# EAGLE board oldClock2 (EAGLE 6.5.0)
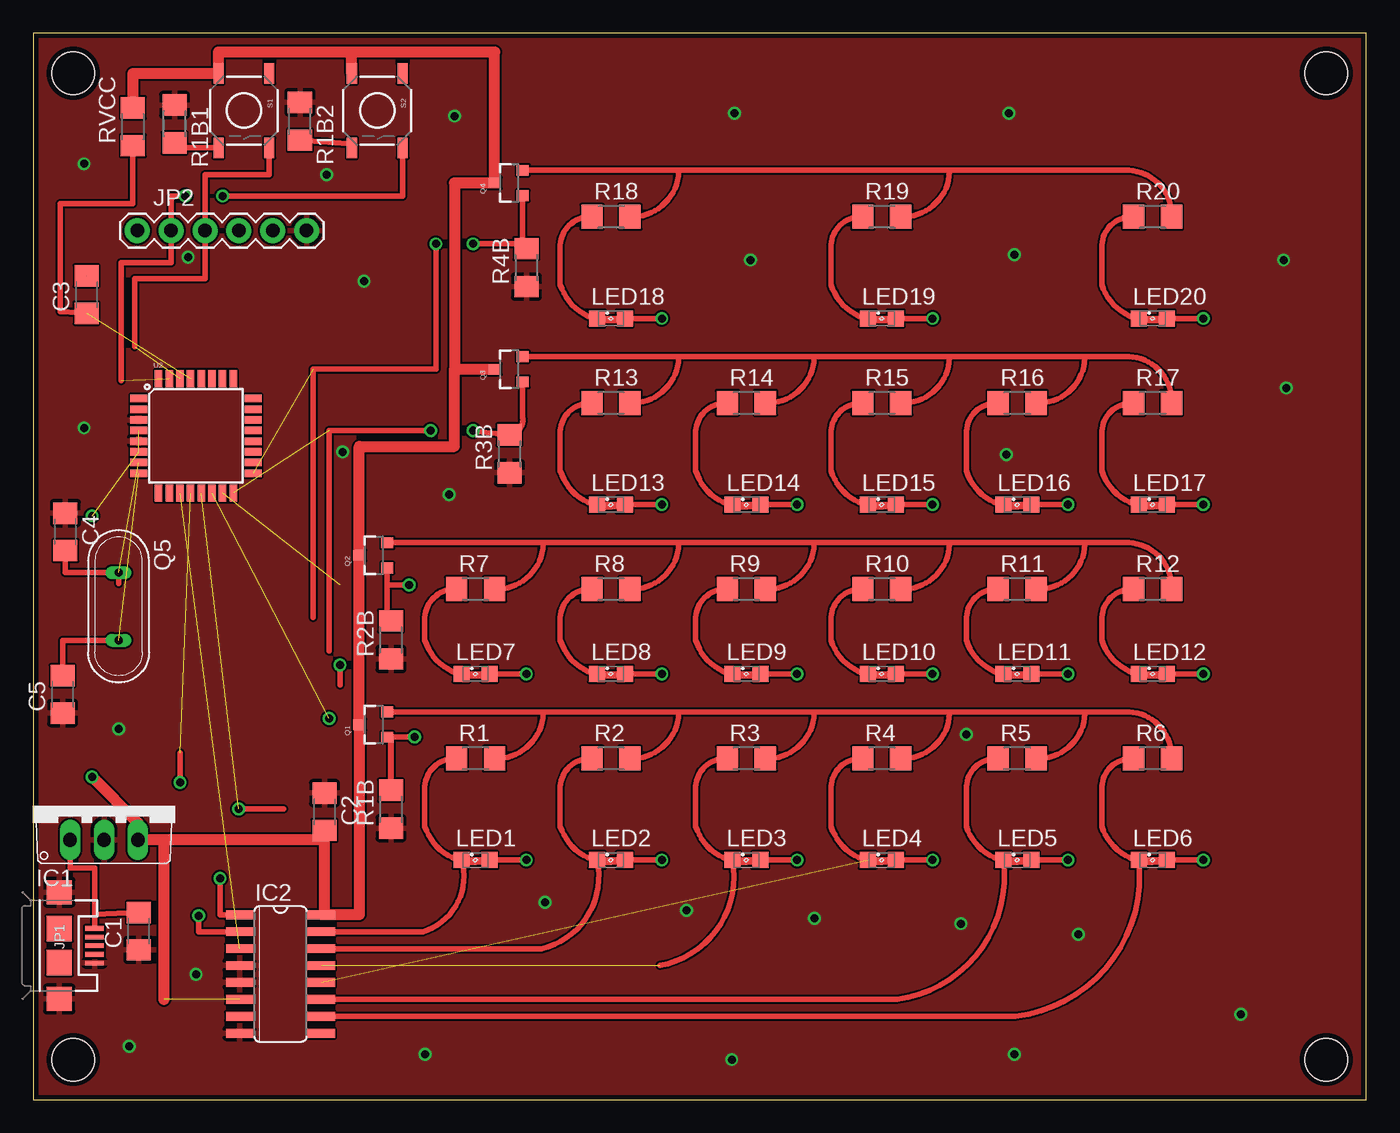
[diagram p0: board, top side]
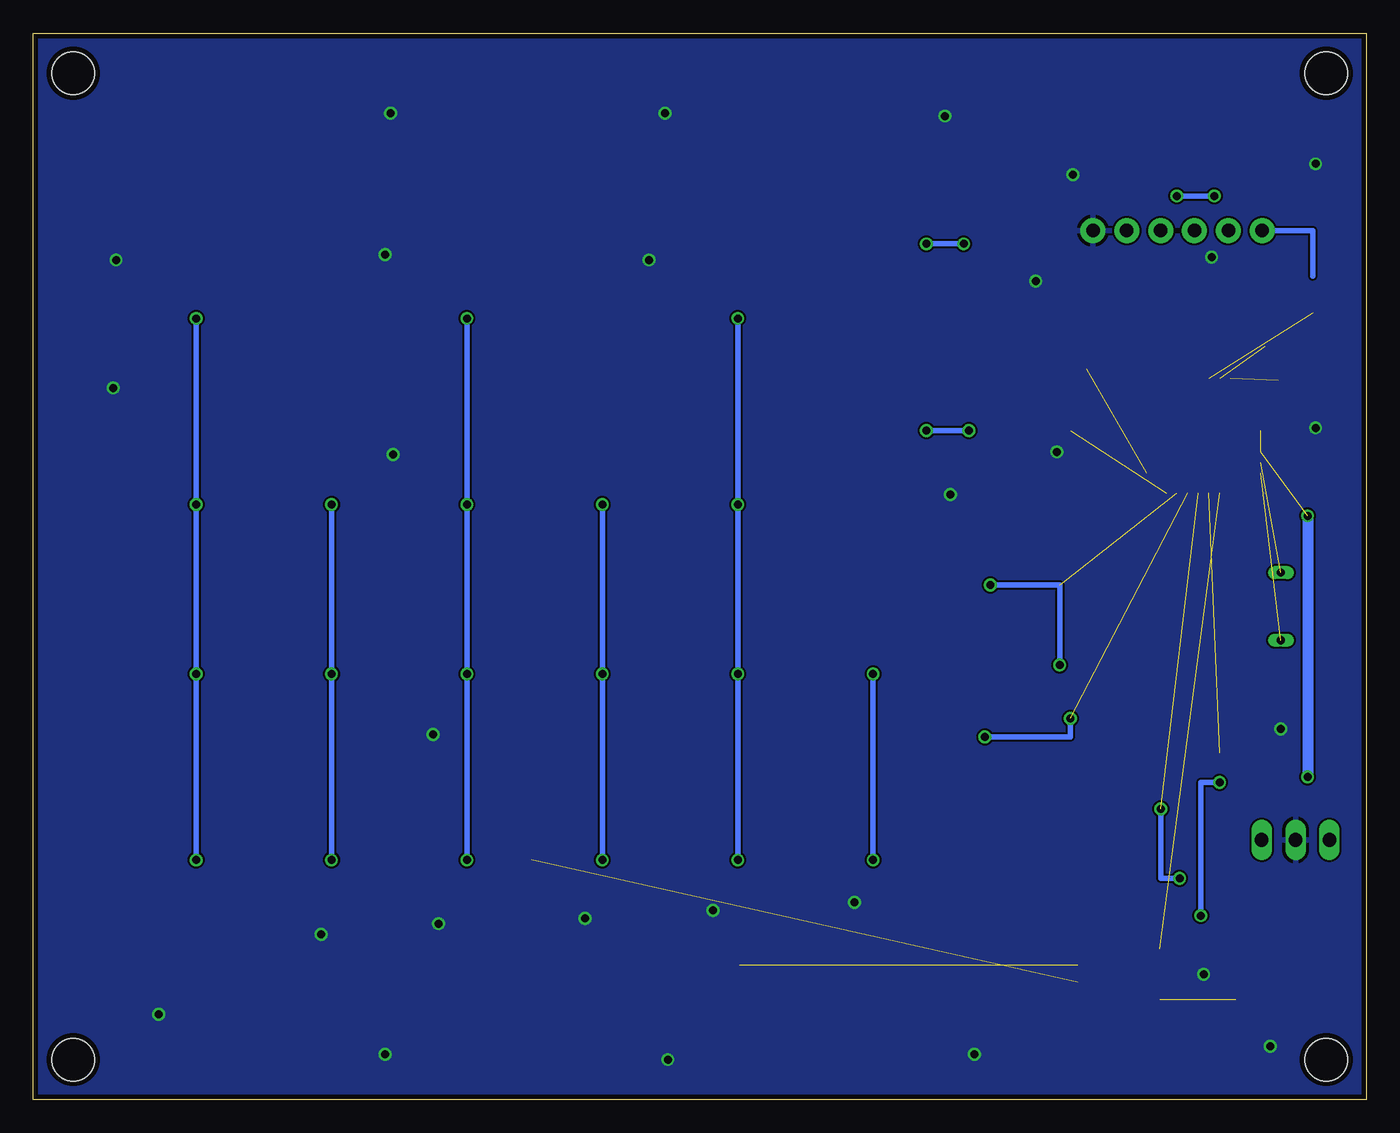
[diagram p1: board, bottom side, seen from below]

Size 100 x 80 mm. Coordinates in mm from the lower left corner, seen from the top.
Outline: 0,0 100,0 100,80 0,80 0,0
Copper layers (1*16): Top 0.0356mm / dielectric 1.5011mm / Bottom 0.0356mm
Design rules "LaenPCBOrder": minimum track width 6mil, minimum drill 13mil, track to track 6mil, track to pad 6mil, pad to pad 6mil, via to via 6mil, smd to smd 6mil, copper to edge 15mil, drill to drill 6mil, minimum pad ring 7mil, minimum via ring 7mil, stop-mask expansion 3mil, vias tented up to drill 0mil, thermal gap 10mil
Holes 3.2 mm at 97,77 97,3 3,77 3,3

## Footprints (pad centres in the part's own frame; a part is rotated, then mirrored left to right if it is on the bottom)
C1206 = smd 1.6 x 1.8: 1 -1.4,0; 2 1.4,0
TO220V = drill 1.016 long: 1 -2.54,-2.54; 2 0,-2.54; 3 2.54,-2.54
SO16 = smd 0.66 x 2.032: 1 -4.445,-3.073; 2 -3.175,-3.073; 3 -1.905,-3.073; 4 -0.635,-3.073; 5 0.635,-3.073; 6 1.905,-3.073; 7 3.175,-3.073; 8 4.445,-3.073; 9 4.445,3.073; 10 3.175,3.073; 11 1.905,3.073; 12 0.635,3.073; 13 -0.635,3.073; 14 -1.905,3.073; 15 -3.175,3.073; 16 -4.445,3.073
USB-MICROB = smd 0.35 x 1.4: D+ 0,2.65; D- -0.65,2.65; GND 1.3,2.65; ID 0.65,2.65; VBUS -1.3,2.65 | smd 1.8 x 1.9: MT1 -4,0; MT2 4,0 | smd 1.9 x 1.9: P$1 -1.27,0; P$2 1.27,0
FTDI_BASIC = drill 1.016 pad 1.88: CTS 10.16,0; DTR 0,0; GND 12.7,0; RXI 2.54,0; TXO 5.08,0; VCC 7.62,0
SML0805 = smd 1.2 x 1.2: A 1.05,0; C -1.05,0
SOT23-3 = smd 0.8 x 0.9: 1 -0.95,-1; 2 0.95,-1; 3 0,1.1
QS = drill 0.61 long: 1 -2.54,0; 2 2.54,0
R1206 = smd 1.6 x 1.803: 1 -1.422,0; 2 1.422,0
TACTILE-SWITCH-SMD = smd 1.524 x 0.762: 1 -2.794,1.905; 2 2.794,1.905; 3 -2.794,-1.905; 4 2.794,-1.905
TQFP32-08 = smd 1.27 x 0.559: 1 -4.293,2.8; 2 -4.293,2; 3 -4.293,1.2; 4 -4.293,0.4; 5 -4.293,-0.4; 6 -4.293,-1.2; 7 -4.293,-2; 8 -4.293,-2.8; 17 4.293,-2.8; 18 4.293,-2; 19 4.293,-1.2; 20 4.293,-0.4; 21 4.293,0.4; 22 4.293,1.2; 23 4.293,2; 24 4.293,2.8 | smd 0.559 x 1.27: 9 -2.8,-4.293; 10 -2,-4.293; 11 -1.2,-4.293; 12 -0.4,-4.293; 13 0.4,-4.293; 14 1.2,-4.293; 15 2,-4.293; 16 2.8,-4.293; 25 2.8,4.293; 26 2,4.293; 27 1.2,4.293; 28 0.4,4.293; 29 -0.4,4.293; 30 -1.2,4.293; 31 -2,4.293; 32 -2.8,4.293

## Placement (x,y rotation side)
C1  33u  [C1206]  7.92,12.63 90 top
C2  10u  [C1206]  21.85,21.59 270 top
C3  10u  [C1206]  4,60.4 90 top
C4  18p  [C1206]  2.4,42.6 270 top
C5  18p  [C1206]  2.2,30.4 90 top
IC1  7805TV  [TO220V]  5.3,22.02 0 top
IC2  74AC138D  [SO16]  18.54,9.42 270 top
JP1  USB-MICROB  [USB-MICROB]  1.94,11.55 270 top
JP2  FTDI_BASICPTH  [FTDI_BASIC]  7.8,65.2 0 top
LED1  [SML0805]  33.18,17.97 0 top
LED2  [SML0805]  43.34,17.97 0 top
LED3  [SML0805]  53.5,17.97 0 top
LED4  [SML0805]  63.66,17.97 0 top
LED5  [SML0805]  73.82,17.97 0 top
LED6  [SML0805]  83.98,17.97 0 top
LED7  [SML0805]  33.18,31.94 0 top
LED8  [SML0805]  43.34,31.94 0 top
LED9  [SML0805]  53.5,31.94 0 top
LED10  [SML0805]  63.66,31.94 0 top
LED11  [SML0805]  73.82,31.94 0 top
LED12  [SML0805]  83.98,31.94 0 top
LED13  [SML0805]  43.34,44.64 0 top
LED14  [SML0805]  53.5,44.64 0 top
LED15  [SML0805]  63.66,44.64 0 top
LED16  [SML0805]  73.82,44.64 0 top
LED17  [SML0805]  83.98,44.64 0 top
LED18  [SML0805]  43.34,58.61 0 top
LED19  [SML0805]  63.66,58.61 0 top
LED20  [SML0805]  83.98,58.61 0 top
Q1  MOSFET-NCHANNELBSS138  [SOT23-3]  25.56,28.13 90 top
Q2  MOSFET-NCHANNELBSS138  [SOT23-3]  25.56,40.83 90 top
Q3  MOSFET-NCHANNELBSS138  [SOT23-3]  35.72,54.8 90 top
Q4  MOSFET-NCHANNELBSS138  [SOT23-3]  35.72,68.77 90 top
Q5  16M  [QS]  6.4,37 270 top
R1  150  [R1206]  33.18,25.59 0 top
R1B  4.7k  [R1206]  26.83,21.78 90 top
R1B1  4.7k  [R1206]  10.6,73.2 270 top
R1B2  4.7k  [R1206]  20,73.4 270 top
R2  150  [R1206]  43.34,25.59 0 top
R2B  4.7k  [R1206]  26.83,34.48 90 top
R3  150  [R1206]  53.5,25.59 0 top
R3B  4.7k  [R1206]  35.72,48.45 90 top
R4  150  [R1206]  63.66,25.59 0 top
R4B  4.7k  [R1206]  36.99,62.42 90 top
R5  150  [R1206]  73.82,25.59 0 top
R6  150  [R1206]  83.98,25.59 0 top
R7  150  [R1206]  33.18,38.29 0 top
R8  150  [R1206]  43.34,38.29 0 top
R9  150  [R1206]  53.5,38.29 0 top
R10  150  [R1206]  63.66,38.29 0 top
R11  150  [R1206]  73.82,38.29 0 top
R12  150  [R1206]  83.98,38.29 0 top
R13  150  [R1206]  43.34,52.26 0 top
R14  150  [R1206]  53.5,52.26 0 top
R15  150  [R1206]  63.66,52.26 0 top
R16  150  [R1206]  73.82,52.26 0 top
R17  150  [R1206]  83.98,52.26 0 top
R18  150  [R1206]  43.34,66.23 0 top
R19  150  [R1206]  63.66,66.23 0 top
R20  150  [R1206]  83.98,66.23 0 top
RVCC  10k  [R1206]  7.46,72.99 90 top
S1  TAC_SWITCHSMD  [TACTILE-SWITCH-SMD]  15.8,74.2 270 top
S2  TAC_SWITCHSMD  [TACTILE-SWITCH-SMD]  25.8,74.2 270 top
U2  ATMEGA328P_TQFP  [TQFP32-08]  12.2,49.8 0 top

## Library data of the parts
C1-C5 R1 R1B R1B1 R1B2 R2 R2B R3 R3B R4 R4B R5-R20 RVCC = rcl
IC1 = linear
IC2 = 74xx-eu
JP1 = SparkFun-Connectors; PROD_ID: CONN-09505
JP2 = SparkFun-Connectors
LED1-LED20 = led
Q1-Q4 = SparkFun-DiscreteSemi; PROD_ID: TRANS-00830
Q5 = special
S1 S2 = SparkFun-Electromechanical; PROD_ID: SWCH-08247
U2 = SparkFun-DigitalIC; PROD_ID: IC-09069

## Nets
+5V: C2.2 IC1.3 IC2.6 IC2.16 Q1.3 Q2.3 Q3.3 Q4.3 RVCC.2 S1.3 S2.3 U2.4 U2.6
BIT1: Q1.1 R1B.2 U2.14
BIT2: Q2.1 R2B.2 U2.15
BIT4: Q3.1 R3B.2 U2.16
BIT8: Q4.1 R4B.2 U2.17
GND: C1.1 C2.1 C4.1 C5.1 IC1.2 IC2.4 IC2.5 IC2.8 JP1.GND JP1.MT1 JP1.MT2 JP2.GND R1B1.1 R1B2.1 R1B.1 R2B.1 R3B.1 R4B.1 U2.3 U2.5
H_ONE: IC2.14 LED2.C LED8.C LED13.C LED18.C
H_TEN: IC2.15 LED1.C LED7.C
HOUR_BTN: JP2.TXO S1.2 U2.30
MIN_BTN: JP2.RXI S2.2 U2.31
MIN_ONE: IC2.12 LED4.C LED10.C LED15.C LED19.C
MIN_TEN: IC2.13 LED3.C LED9.C LED14.C
MUX0: IC2.1 U2.13
MUX1: IC2.2 U2.12
MUX2: IC2.3 U2.11
N$1: C1.2 IC1.1 JP1.VBUS
N$2: C5.2 Q5.2 U2.8
N$4: C4.2 Q5.1 U2.7
N$7: Q4.2 R18.2 R19.2 R20.2
N$9: LED1.A R1.1
N$10: Q1.2 R1.2 R2.2 R3.2 R4.2 R5.2 R6.2
N$11: R1B1.2 S1.4
N$12: R1B2.2 S2.4
N$13: LED2.A R2.1
N$15: C3.2 JP2.DTR
N$17: LED3.A R3.1
N$21: LED7.A R7.1
N$22: Q2.2 R7.2 R8.2 R9.2 R10.2 R11.2 R12.2
N$25: LED8.A R8.1
N$28: LED13.A R13.1
N$29: LED9.A R9.1
N$32: Q3.2 R13.2 R14.2 R15.2 R16.2 R17.2
N$34: LED4.A R4.1
N$38: LED5.A R5.1
N$40: LED18.A R18.1
N$42: LED6.A R6.1
N$46: LED10.A R10.1
N$50: LED11.A R11.1
N$54: LED12.A R12.1
N$60: LED14.A R14.1
N$64: LED15.A R15.1
N$68: LED19.A R19.1
N$72: LED16.A R16.1
N$76: LED17.A R17.1
N$80: LED20.A R20.1
RESET: C3.1 RVCC.1 U2.29
SEC_ONE: IC2.10 LED6.C LED12.C LED17.C LED20.C
SEC_TEN: IC2.11 LED5.C LED11.C LED16.C

## Tracks (layer width: path | path; a pad name or v marks a point on that pad's centre or on a via)
+5V  (via drill 0.6)  (3 unrouted)
  Top 0.406: 23.89,77.5 S2.3 | IC2.16 21.85,13.87 | C2.2 21.85,19.48 | 7.84,20.76 IC1.3
  Top 0.813: 23.89,78.6 34.62,78.6 Q4.3 31.6,68.77 31.6,54.8 | 23.89,78.6 13.9,78.6 S1.3 7.46,76.99 RVCC.2 | 31.6,54.8 Q3.3 | 31.6,54.8 31.6,49 24.46,49 Q2.3 Q1.3 24.46,13.87 IC2.16 | 21.85,13.87 C2.2 | 21.85,19.48 9.8,19.48 | 9.8,19.48 IC1.3 | 9.8,7.51 9.8,19.48 | v4.4,24.2 7.84,20.76 | S2.3 23.89,78.6
  Bottom 0.813: v4.4,43.8 v4.4,24.2
BIT1  (via drill 0.6)  (1 unrouted)
  Top 0.406: Q1.1 arc-90 26.83,26.91 R1B.2 26.83,23.4 | Q1.1 26.8,26.94 26.8,23.6 | Q1.1 26.56,27.2 v28.6,27.2 | v22.2,28.6 22.2,28.56
  Bottom 0.406: v28.6,27.2 22.2,27.2 v22.2,28.6
BIT2  (via drill 0.6)  (1 unrouted)
  Top 0.406: R2B.2 arc-90 26.56,36.45 26.56,38.6 | 26.56,38.6 Q2.1 | 23,31.1 v23,32.6 | v28.2,38.6 26.56,38.6
  Bottom 0.406: v23,32.6 23,38.6 v28.2,38.6
BIT4  (via drill 0.6)  (1 unrouted)
  Top 0.406: Q3.1 36.72,51.15 arc-90 R3B.2 33,50.15 v33,50.2 | 22.2,33.64 22.2,50.2 v29.8,50.2
  Bottom 0.406: v29.8,50.2 v33,50.2
BIT8  (via drill 0.6)  (1 unrouted)
  Top 0.406: Q4.1 36.72,64.39 arc90 R4B.2 36.91,64.2 v33,64.2 | v30.2,64.2 30.2,54.8 21,54.8 21,36.18
  Bottom 0.406: v33,64.2 v30.2,64.2
GND  (via drill 0.6)
  other vias: 38.4,14.8 49,14.2 58.6,13.6 69.6,13.2 78.4,12.4 70,27.4 73,48.4 94,53.4 93.8,63 73.2,74 73.6,63.4 53.8,63 52.6,74 31.6,73.8 22,69.4 24.8,61.4 11.6,63.2 3.8,70.2 3.8,50.4 6.4,27.8 7.2,4 12.2,9.4 29.4,3.4 52.4,3 73.6,3.4 90.6,6.4 31.2,45.4 23.2,48.6
  pour Top: 0,0 100.33,0 100.33,80.01 0,80.01
  pour Top (isolate 0.01): 0,0 100.33,0 100.33,80.01 0,80.01
  pour Bottom (isolate 0.01): 0,0 100.33,0 100.33,80.01 0,80.01
H_ONE  (via drill 0.6)
  Top 0.406: v47.15,17.97 LED2.C arc-90 38.12,11.32 IC2.14 | LED8.C v47.15,31.94 | LED18.C v47.15,58.61 | LED13.C v47.15,44.64
  Bottom 0.406: v47.15,31.94 v47.15,17.97 v47.15,44.64 v47.15,58.61
H_TEN  (via drill 0.6)
  Top 0.406: v36.99,17.97 LED1.C arc-90 29.23,12.6 IC2.15 | v36.99,31.94 LED7.C
  Bottom 0.406: v36.99,17.97 v36.99,31.94
HOUR_BTN  (1 unrouted)
  Top 0.406: 7.6,56.5 7.6,61.6 12.88,61.6 JP2.TXO 12.88,69.4 17.7,69.4 S1.2
MIN_BTN  (via drill 0.6)  (1 unrouted)
  Top 0.406: 6.6,53.96 6.6,62.8 10.34,62.8 JP2.RXI 10.34,67.8 v11.4,67.8 | v14.2,67.8 27.7,67.8 S2.2
  Bottom 0.406: v11.4,67.8 v14.2,67.8
MIN_ONE  (via drill 0.6)  (1 unrouted)
  Top 0.406: LED19.C v67.47,58.61 | v67.47,17.97 LED4.C | LED10.C v67.47,31.94 | LED15.C v67.47,44.64
  Bottom 0.406: v67.47,58.61 v67.47,44.64 v67.47,31.94 v67.47,17.97
MIN_TEN  (via drill 0.6)  (1 unrouted)
  Top 0.406: v57.31,17.97 LED3.C arc-90 47.01,10.05 | v57.31,44.64 LED14.C | LED9.C v57.31,31.94
  Bottom 0.406: v57.31,17.97 v57.31,31.94 v57.31,44.64
MUX0  (via drill 0.6)  (1 unrouted)
  Top 0.406: 18.78,21.8 v15.4,21.8 | v14,16.6 14,13.87 IC2.1
  Bottom 0.406: v15.4,21.8 15.4,16.6 v14,16.6
MUX1  (via drill 0.6)  (1 unrouted)
  Top 0.406: IC2.2 12.4,12.6 v12.4,13.8 | v11,23.8 11,26.02
  Bottom 0.406: v12.4,13.8 12.4,23.8 v11,23.8
MUX2  (1 unrouted)
N$1
  Top 0.406: IC1.1 2.76,17.4 4.59,17.4 JP1.VBUS 4.59,13.9 C1.2
N$2  (1 unrouted)
  Top 0.406: Q5.2 2.2,34.46 C5.2
N$4  (1 unrouted)
  Top 0.406: 6.4,38.72 Q5.1 2.4,39.54 C4.2
N$7
  Top 0.406: R20.2 arc90 82.19,69.72 68.74,69.72 | 68.74,69.72 48.42,69.72 | 48.42,69.72 Q4.2 | R18.2 arc90 48.42,69.61 48.42,69.72 | R19.2 arc90 68.74,69.61 68.74,69.72
N$9
  Top 0.406: LED1.A arc-90 29.37,20.51 29.37,23.48 arc-90 R1.1
N$10
  Top 0.406: R6.2 arc90 82.19,29.08 78.9,29.08 | 78.9,29.08 68.74,29.08 | 68.74,29.08 58.58,29.08 | 58.58,29.08 48.42,29.08 | 48.42,29.08 38.26,29.08 | 38.26,29.08 Q1.2 | R3.2 arc90 58.58,28.97 58.58,29.08 | R4.2 arc90 68.74,28.97 68.74,29.08 | R5.2 arc90 78.9,28.97 78.9,29.08 | R2.2 arc90 48.42,28.97 48.42,29.08 | R1.2 arc90 38.26,28.97 38.26,29.08
N$11
  Top 0.406: S1.4 10.69,71.41 R1B1.2
N$12
  Top 0.406: R1B2.2 23.6,71.7 S2.4
N$13
  Top 0.406: LED2.A arc-90 39.53,20.51 39.53,23.48 arc-90 R2.1
N$15  (1 unrouted)
  Bottom 0.406: C3.2 4,65.2 JP2.DTR
N$17
  Top 0.406: LED3.A arc-90 49.69,20.51 49.69,23.48 arc-90 R3.1
N$21
  Top 0.406: LED7.A arc-90 29.37,34.48 29.37,36.18 arc-90 R7.1
N$22
  Top 0.406: R12.2 arc90 82.19,41.78 78.9,41.78 | 78.9,41.78 68.74,41.78 | 68.74,41.78 58.58,41.78 | 58.58,41.78 48.42,41.78 | 48.42,41.78 38.26,41.78 | 38.26,41.78 Q2.2 | 68.74,41.78 68.74,41.67 arc-90 R10.2 | R11.2 arc90 78.9,41.67 78.9,41.78 | R8.2 arc90 48.42,41.67 48.42,41.78 | R7.2 arc90 38.26,41.67 38.26,41.78 | R9.2 arc90 58.58,41.67 58.58,41.78
N$25
  Top 0.406: LED8.A arc-90 39.53,34.48 39.53,36.18 arc-90 R8.1
N$28
  Top 0.406: LED13.A arc-90 39.53,47.18 39.53,50.15 arc-90 R13.1
N$29
  Top 0.406: LED9.A arc-90 49.69,34.48 49.69,36.18 arc-90 R9.1
N$32
  Top 0.406: R17.2 arc90 82.19,55.75 78.9,55.75 | 78.9,55.75 68.74,55.75 | 68.74,55.75 58.58,55.75 | 58.58,55.75 48.42,55.75 | 48.42,55.75 Q3.2 | R16.2 arc90 78.9,55.64 78.9,55.75 | R15.2 arc90 68.74,55.64 68.74,55.75 | R14.2 arc90 58.58,55.64 58.58,55.75 | R13.2 arc90 48.42,55.64 48.42,55.75
N$34
  Top 0.406: LED4.A arc-90 59.85,20.51 59.85,23.48 arc-90 R4.1
N$38
  Top 0.406: LED5.A arc-90 70.01,20.51 70.01,23.48 arc-90 R5.1
N$40
  Top 0.406: LED18.A arc-90 39.53,61.15 39.53,64.12 arc-90 R18.1
N$42
  Top 0.406: LED6.A arc-90 80.17,20.51 80.17,23.48 arc-90 R6.1
N$46
  Top 0.406: LED10.A arc-90 59.85,34.48 59.85,36.18 arc-90 R10.1
N$50
  Top 0.406: LED11.A arc-90 70.01,34.48 70.01,36.18 arc-90 R11.1
N$54
  Top 0.406: LED12.A arc-90 80.17,34.48 80.17,36.18 arc-90 R12.1
N$60
  Top 0.406: LED14.A arc-90 49.69,47.18 49.69,50.15 arc-90 R14.1
N$64
  Top 0.406: LED15.A arc-90 59.85,47.18 59.85,50.15 arc-90 R15.1
N$68
  Top 0.406: LED19.A arc-90 59.85,61.15 59.85,64.12 arc-90 R19.1
N$72
  Top 0.406: LED16.A arc-90 70.01,47.18 70.01,50.15 arc-90 R16.1
N$76
  Top 0.406: LED17.A arc-90 80.17,47.18 80.17,50.15 arc-90 R17.1
N$80
  Top 0.406: LED20.A arc-90 80.17,61.15 80.17,64.12 arc-90 R20.1
RESET  (1 unrouted)
  Top 0.406: C3.1 2,59.13 2,67.2 7.46,67.2 RVCC.1
SEC_ONE  (via drill 0.6)
  Top 0.406: v87.79,17.97 LED6.C arc-90 73.68,6.25 IC2.10 | v87.79,58.61 LED20.C | LED17.C v87.79,44.64 | LED12.C v87.79,31.94
  Bottom 0.406: v87.79,17.97 v87.79,31.94 v87.79,44.64 v87.79,58.61
SEC_TEN  (via drill 0.6)
  Top 0.406: v77.63,17.97 LED5.C arc-90 64.79,7.51 IC2.11 | LED11.C v77.63,31.94 | LED16.C v77.63,44.64
  Bottom 0.406: v77.63,17.97 v77.63,31.94 v77.63,44.64

## Text on the board
Drills: Noah Erickson / Binary Clock Rev1